# EAGLE board picoAvaR13 (EAGLE 6.1)
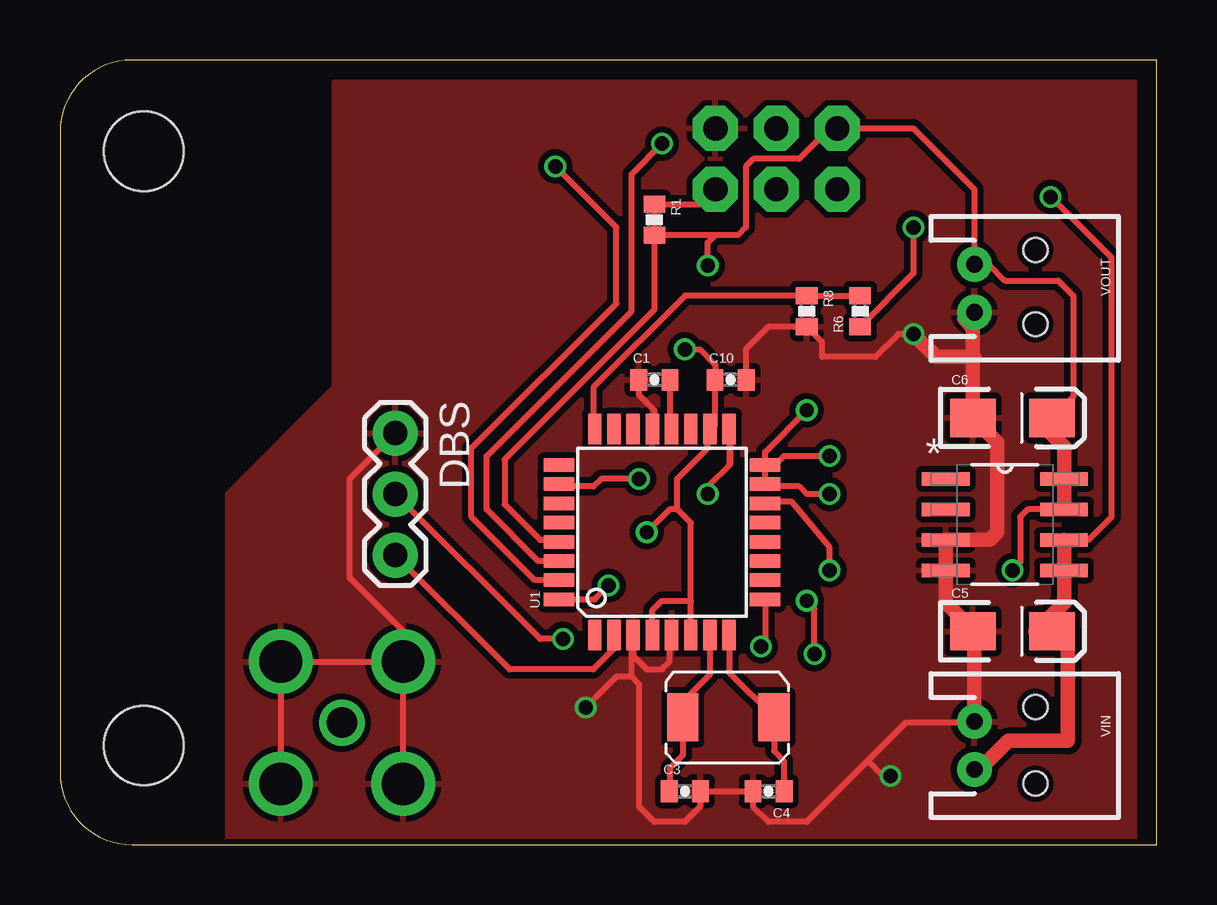
[diagram p0: board, top side]
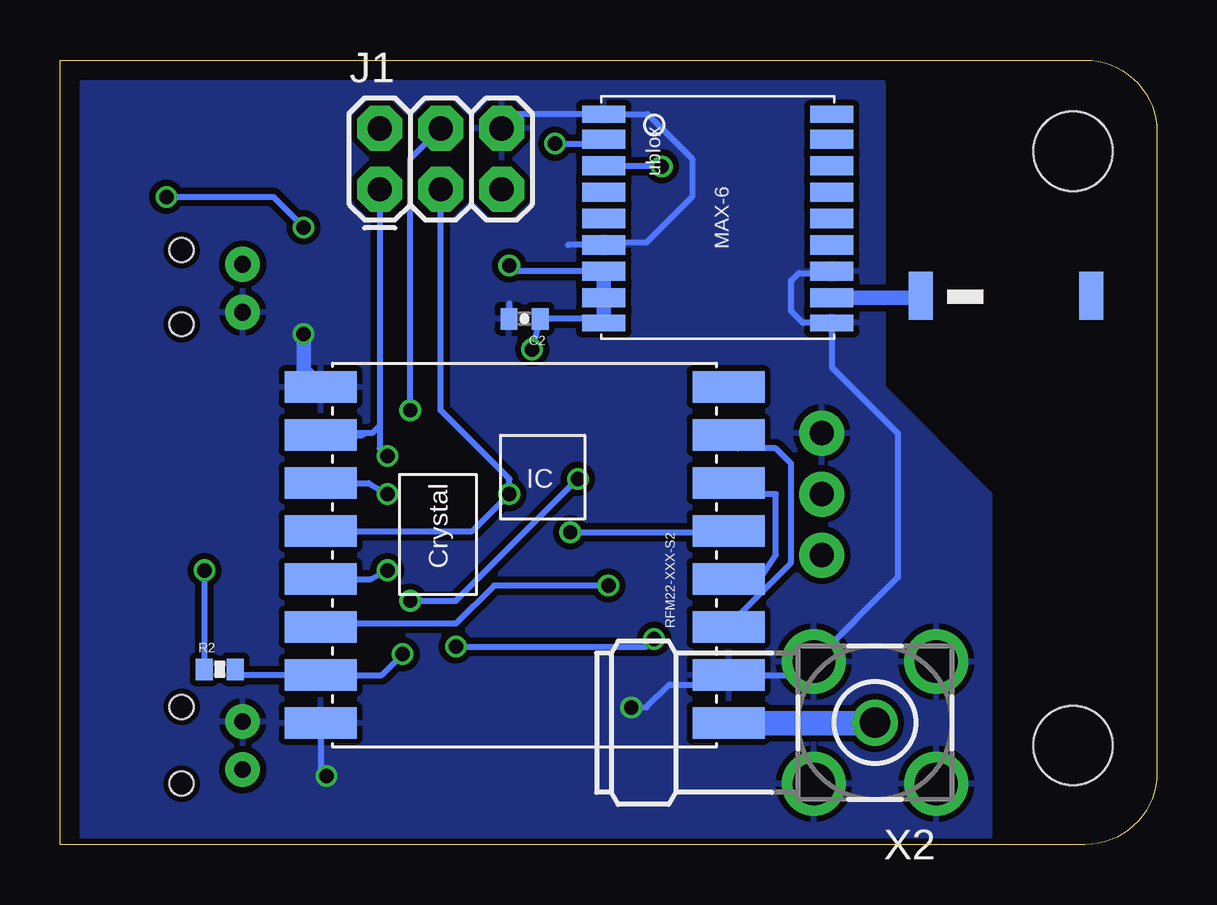
[diagram p1: board, bottom side, seen from below]

Size 45.71 x 32.69 mm. Coordinates in mm from the lower left corner, seen from the top.
Outline: 0,29.69 0,3 arc90 3,0 45.71,0 45.71,32.69 3,32.69 arc90 0,29.69
Copper layers (1*16): Top 0.035mm / dielectric 1.5mm / Bottom 0.035mm
Design rules: minimum track width 6mil, minimum drill 12mil, track to track 6mil, track to pad 6mil, pad to pad 6mil, via to via 6mil, smd to smd 0mil, copper to edge 10mil, drill to drill 10mil, minimum pad ring 10mil, minimum via ring 6mil, stop-mask expansion 2mil, vias tented up to drill 100mil, thermal gap 10mil
Net classes: 0 default: width 0.203 mm; 1 vcc: width 0.254 mm
Holes 1 mm at 40.64,5.74 40.64,2.54 40.64,21.68 40.64,24.77

## Footprints (pad centres in the part's own frame; a part is rotated, then mirrored left to right if it is on the bottom)
0402-CAP = smd 0.7 x 0.9: 1 -0.65,0; 2 0.65,0
EIA3216-KIT = smd 1.9 x 1.6: A 1.65,0; C -1.65,0
1X03 = drill 1.016 pad 1.88: 1 0,0; 2 2.54,0; 3 5.08,0
2X3 = drill 1.016 pad 1.88 octagon: 1 0,0; 2 0,2.54; 3 2.54,0; 4 2.54,2.54; 5 5.08,0; 6 5.08,2.54
STAND-OFF = hole 3.302: 0,0
0402-RES = smd 0.7 x 0.9: 1 -0.65,0; 2 0.65,0
RFM22-XXX-S2 = smd 3 x 1.3: 1 -8.5,7; 2 -8.5,5; 3 -8.5,3; 4 -8.5,1; 5 -8.5,-1; 6 -8.5,-3; 7 -8.5,-5; 8 -8.5,-7; 9 8.5,-7; 10 8.5,-5; 11 8.5,-3; 12 8.5,-1; 13 8.5,1; 14 8.5,3; 15 8.5,5; 16 8.5,7
TQFP32-08 = smd 1.27 x 0.559: 1 -4.293,2.8; 2 -4.293,2; 3 -4.293,1.2; 4 -4.293,0.4; 5 -4.293,-0.4; 6 -4.293,-1.2; 7 -4.293,-2; 8 -4.293,-2.8; 17 4.293,-2.8; 18 4.293,-2; 19 4.293,-1.2; 20 4.293,-0.4; 21 4.293,0.4; 22 4.293,1.2; 23 4.293,2; 24 4.293,2.8 | smd 0.559 x 1.27: 9 -2.8,-4.293; 10 -2,-4.293; 11 -1.2,-4.293; 12 -0.4,-4.293; 13 0.4,-4.293; 14 1.2,-4.293; 15 2,-4.293; 16 2.8,-4.293; 25 2.8,4.293; 26 2,4.293; 27 1.2,4.293; 28 0.4,4.293; 29 -0.4,4.293; 30 -1.2,4.293; 31 -2,4.293; 32 -2.8,4.293
SOIC127P600X175-8N = smd 1.981 x 0.559: 1 -2.464,1.905; 2 -2.464,0.635; 3 -2.464,-0.635; 4 -2.464,-1.905; 5 2.464,-1.905; 6 2.464,-0.635; 7 2.464,0.635; 8 2.464,1.905
UBLOX_MAX-6 = smd 1.8 x 0.7: 1_GND 4.95,-4.4; 9_V_RESET 4.95,4.3; 10_GND -4.55,4.3; 18_RESERVED -4.55,-4.4 | smd 1.8 x 0.8: 2_TXD1 4.95,-3.35; 3_RXD1 4.95,-2.25; 4_TIMEPULSE 4.95,-1.15; 5_EXTINT0 4.95,-0.05; 6_V_BCKP 4.95,1.05; 7_VCC_IO 4.95,2.15; 8_VCC 4.95,3.25; 11_RF_IN -4.55,3.25; 12_GND -4.55,2.15; 13_ANTON -4.55,1.05; 14_VCC_RF -4.55,-0.05; 15_RESERVED -4.55,-1.15; 16_SDA2 -4.55,-2.25; 17_SCL2 -4.55,-3.35
ABRACON_ABM3_CRYSTAL = smd 1.3 x 2: P$1 -3.4,0.1; P$2 0.4,0.1
JTI_ANTENNA-1575AT43A40 = smd 1 x 2: FEED -3.81,-1.27; NC 3.29,-1.27
JST-2-PTH = drill 0.7 pad 1.448: 1 -1,0; 2 1,0
BU-SMA-H = drill 1.27: 1 0,0 | drill 1.778: 2 -2.55,2.55; 3 2.55,2.55; 4 2.55,-2.55; 5 -2.55,-2.55

## Placement (x,y rotation side)
C1  0.1uF  [0402-CAP]  24.77,19.37 0 top
C2  0.1uF  [0402-CAP]  26.35,21.91 180 bottom
C3  18pF  [0402-CAP]  26.04,2.22 0 top
C4  18pF  [0402-CAP]  29.53,2.22 180 top
C5  [EIA3216-KIT]  39.69,8.89 0 top
C6  4.7uF  [EIA3216-KIT]  39.69,17.78 0 top
C10  0.1uF  [0402-CAP]  27.94,19.37 0 top
DBS  [1X03]  13.97,17.14 270 top
J1  AVR_SPI_PRG_6PTH  [2X3]  32.38,27.3 0 bottom
JP1  STAND-OFF  [STAND-OFF]  3.49,4.13 0 top
JP2  STAND-OFF  [STAND-OFF]  3.49,28.89 0 top
R1  10k  [0402-RES]  24.77,26.04 270 top
R2  10k  [0402-RES]  39.05,7.3 0 bottom
R6  100k  [0402-RES]  33.34,22.23 90 top
R8  10k  [0402-RES]  31.11,22.23 270 top
RFM22-XXX-S2  RFM22  [RFM22-XXX-S2]  26.35,12.06 180 bottom
U1  ATMEGA328  [TQFP32-08]  25.08,13.02 90 top
U2  TPS76633D  [SOIC127P600X175-8N]  39.37,13.34 0 top
U$1  UBLOX_MAX-6  [UBLOX_MAX-6]  18.1,26.04 180 bottom
U$2  ABRACON_ABM3_CRYSTAL  [ABRACON_ABM3_CRYSTAL]  26.35,5.4 180 top
U$3  JTI_ANTENNA-1575AT43A40  [JTI_ANTENNA-1575AT43A40]  6.03,24.13 0 bottom
VIN  [JST-2-PTH]  38.1,4.13 270 top
VOUT  [JST-2-PTH]  38.1,23.18 270 top
X2  BU-SMA-H  [BU-SMA-H]  11.75,5.08 180 bottom

## Library data of the parts
C1-C6 C10 DBS J1 JP1 JP2 R1 R2 R6 R8 RFM22-XXX-S2 U1 VIN VOUT = SparkFun
U2 = ava; DESCRIPTION: ULTRALOW QUIESCENT CURRENT 250-mA LOW DROPOUT VOLTAGE REGULATORS; MPN: TPS76633D; OC_FARNELL: 8461422; OC_NEWARK: 77C1060; PACKAGE: SOIC-8; SUPPLIER: Texas Instruments
U$1-U$3 = ava
X2 = con-coax; OC_FARNELL: unknown; OC_NEWARK: unknown

## Nets
AREF: C1.2 U1.20
GND [vcc]: C1.1 C2.2 C3.2 C4.2 C5.C C6.C C10.2 DBS.1 J1.6 R8.2 RFM22-XXX-S2.2 RFM22-XXX-S2.9 RFM22-XXX-S2.16 U1.3 U1.5 U1.21 U2.3 U2.4 U$1.1_GND U$1.6_V_BCKP U$1.10_GND U$1.12_GND VIN.1 VOUT.2 X2.2 X2.3 X2.4 X2.5
MISO: J1.1 RFM22-XXX-S2.10 U1.16
MOSI: J1.4 RFM22-XXX-S2.11 U1.15
N$3: RFM22-XXX-S2.1 X2.1
N$4: U$1.11_RF_IN U$3.FEED
N$5: RFM22-XXX-S2.3 RFM22-XXX-S2.7
N$6: RFM22-XXX-S2.4 RFM22-XXX-S2.6
N$9: C3.1 U1.7 U$2.P$2
N$10: C4.1 U1.8 U$2.P$1
NSS_RX: DBS.2 U1.9
NSS_TX: DBS.3 U1.2
RESET: J1.5 R1.1 U1.29
RFM22_NIRQ: RFM22-XXX-S2.14 U1.32
RFM22_NSEL: RFM22-XXX-S2.13 U1.14
RFM22_SDN: R2.2 RFM22-XXX-S2.15 U1.26
SCK: J1.3 RFM22-XXX-S2.12 U1.17
UBLOX_RXD: U1.31 U$1.3_RXD1
UBLOX_TXD: U1.30 U$1.2_TXD1
VBATT [vcc]: C5.A R6.1 U2.5 U2.6 VIN.2
VBATTADC: R6.2 R8.1 U1.24
VCC: C2.1 C6.A C10.1 J1.2 R1.2 R2.1 RFM22-XXX-S2.5 U1.4 U1.6 U1.18 U2.7 U2.8 U$1.7_VCC_IO U$1.8_VCC U$1.9_V_RESET VOUT.1

## Tracks (layer width: path | path; a pad name or v marks a point on that pad's centre or on a via)
AREF
  Top 0.254: C1.2 25.41,17.24 | 25.4,17.14 25.41,17.16 25.41,17.24 | 25.41,17.24 U1.20
GND  (via drill 0.6)
  Top 0.254: C1.1 24.11,18.75 24.77,18.1 24.77,17.39 U1.21 | C10.2 28.57,19.38 28.57,20.64 29.51,21.57 R8.2 31.75,20.94 31.75,20.32 33.97,20.32 34.92,21.27 v35.56,21.27 | 23.81,6.99 24.13,6.67 24.13,1.59 24.77,0.95 26.04,0.95 26.68,1.6 C3.2 C4.2 28.89,2.21 28.89,1.59 29.53,0.95 31.11,0.95 33.66,3.49 | 23.81,6.99 23.81,8.65 U1.3 23.88,7.87 24.45,7.3 25.08,7.3 25.4,7.62 25.4,8.57 | C6.C 38.04,20.26 38.1,20.32 | 38.1,5.08 35.24,5.08 33.66,3.49 | v34.61,2.86 34.29,2.86 33.66,3.49 | 23.81,6.99 23.18,6.99 v21.91,5.71 | X2.3 X2.4 | X2.4 X2.5 X2.2 | X2.4 14.3,8.88 12.06,11.11 12.06,15.24 DBS.1
  Top 0.61: 38.28,22.23 37.96,21.91 37.67,21.91 38.04,21.54 C6.C 39.05,16.77 39.05,13.02 38.73,12.7 U2.3 U2.4 36.91,10.08 38.04,8.95 | 38.04,8.95 38.1,8.89 38.1,5.08 | C5.C 38.04,8.95 | 38.1,20.32 36.51,20.32 v35.56,21.27
  Bottom 0.254: RFM22-XXX-S2.16 34.85,3.1 v34.61,2.86 | v21.91,5.71 21.27,5.71 20.32,6.67 18.25,6.67 RFM22-XXX-S2.2 14.86,7.07 X2.4 10.79,11.13 10.79,17.14 13.55,19.9 U$1.10_GND 14.75,21.73 15.24,22.23 15.24,23.5 14.92,23.81 13.62,23.81 U$1.12_GND | J1.6 26.71,30.43 U$1.1_GND 21.23,30.43 19.37,28.57 19.37,26.99 21.27,25.08 22.95,25.08 U$1.6_V_BCKP 24.55,24.98 | 26.99,22.54 26.99,21.92 C2.2
  Bottom 0.61: 35.2,19.41 RFM22-XXX-S2.9 35.56,19.77 v35.56,21.27
  pour Bottom (isolate 0.254): 44.77,0 44.77,31.75 11.43,31.75 11.43,19.37 11.43,19.05 6.99,14.61 6.99,0
  pour Top (isolate 0.254): 44.77,0 44.77,31.75 11.43,31.75 11.43,19.37 11.43,19.05 6.99,14.61 6.99,0
MISO  (via drill 0.6)
  Top 0.254: v32.07,16.19 30.16,16.19 29.79,15.82 U1.16
  Bottom 0.254: J1.1 32.38,17.46 | 32.38,17.46 32.7,17.14 33.02,17.14 | 33.02,17.14 34.92,17.14 | RFM22-XXX-S2.10 33.1,17.07 33.02,17.14 | 32.38,17.46 32.38,16.51 v32.07,16.19
MOSI  (via drill 0.6)
  Top 0.254: v32.07,14.61 31.11,14.61 30.8,14.92 29.47,14.92 U1.15 29.38,16.36 v31.11,18.1
  Bottom 0.254: RFM22-XXX-S2.11 32.84,15.06 v32.07,14.61 | v31.11,18.1 31.11,28.57 J1.4
N$3
  Bottom 0.813: 11.76,5.07 X2.1
  Bottom 1.016: RFM22-XXX-S2.1 11.76,5.07
N$4
  Bottom 0.254: 9.92,22.79 U$3.FEED
  Bottom 0.61: U$1.11_RF_IN 9.92,22.79
N$5
  Bottom 0.254: RFM22-XXX-S2.3 17.85,9.13 15.24,11.75 15.24,15.88 15.88,16.51 17.46,16.51 17.78,16.83 17.78,17.14 | 17.78,17.14 | 17.78,17.14 RFM22-XXX-S2.7
N$6
  Bottom 0.254: RFM22-XXX-S2.4 16.56,11.06 15.88,12.06 15.88,14.61 17.39,14.61 RFM22-XXX-S2.6
N$9
  Top 0.254: U1.7 27.08,7.08 25.72,5.71 25.72,5.53 U$2.P$2 25.95,3.73 25.4,3.17 C3.1
N$10
  Top 0.254: U1.8 27.88,7.17 U$2.P$1 29.75,3.9 30.16,3.49 30.16,2.22 C4.1
NSS_RX  (via drill 0.6)
  Top 0.254: U1.9 29.38,8.42 v29.21,8.26 | v20.95,8.57 20,8.57 DBS.2
  Bottom 0.254: v29.21,8.26 21.27,8.26 v20.95,8.57
NSS_TX
  Top 0.254: U1.2 23.08,8.16 22.23,7.3 18.73,7.3 DBS.3
RESET
  Top 0.254: J1.5 26.68,26.68 R1.1 24.77,22.3 18.52,16.05 18.52,14.18 20,12.7 20.64,12.7 | 20.64,12.7 20.95,12.7 | U1.29 20.72,12.62 20.64,12.7
RFM22_NIRQ  (via drill 0.6)
  Top 0.254: U1.32 22.28,10.22 v22.86,10.79
  Bottom 0.254: v22.86,10.79 27.62,10.79 29.21,9.21 34.71,9.21 RFM22-XXX-S2.14
RFM22_NSEL  (via drill 0.6)
  Top 0.254: v32.07,11.43 32.07,12.38 30.48,14.29 29.45,14.29 U1.14
  Bottom 0.254: RFM22-XXX-S2.13 32.75,11.06 v32.07,11.43
RFM22_SDN  (via drill 0.6)
  Top 0.254: v31.43,7.94 31.43,9.84 v31.11,10.16 | v24.13,15.24 22.54,15.24 22.23,14.92 20.95,14.92 20.89,14.92 | 20.64,14.92 20.89,14.92 | 20.89,14.92 U1.26
  Bottom 0.254: R2.2 38.16,7.07 RFM22-XXX-S2.15 32.3,7.07 v31.43,7.94 | v31.11,10.16 29.21,10.16 v24.13,15.24
SCK  (via drill 0.6)
  Top 0.254: 27.88,15.82 27.94,15.88 27.94,17.25 U1.17 27.88,15.82 | 27.88,15.82 26.99,14.92 v26.99,14.61
  Bottom 0.254: RFM22-XXX-S2.12 28.53,13.06 v26.99,14.61 26.99,15.24 29.84,18.1 J1.3
UBLOX_RXD  (via drill 0.6)
  Top 0.254: U1.31 19.78,11.02 17.14,13.65 17.14,16.51 23.18,22.54 23.18,25.72 v20.64,28.26
  Bottom 0.254: v20.64,28.26 23.02,28.26 U$1.3_RXD1
UBLOX_TXD  (via drill 0.6)
  Top 0.254: U1.30 19.93,11.82 17.78,13.97 17.78,16.19 23.81,22.23 23.81,27.94 v25.08,29.21
  Bottom 0.254: v25.08,29.21 23.5,29.21 | 23.18,29.53 22.86,29.53 23.18,29.21 23.5,29.21 | 23.18,29.53 23.5,29.21 | 23.18,29.53 23.18,29.52 U$1.2_TXD1
VBATT  (via drill 0.6)
  Top 0.254: U2.6 42.86,12.7 43.81,13.65 43.81,24.45 v41.27,26.99 | v35.56,25.72 35.56,23.8 R6.1 | VIN.2 38.33,3.13 38.4,3.2
  Top 0.61: C5.A 40.64,8.89 41.83,10.08 U2.5 U2.6 | C5.A 41.91,8.89 | C5.A 41.99,8.89 41.99,4.32 39.52,4.32 38.4,3.2 38.28,3.09
  Bottom 0.254: v41.27,26.99 36.83,26.99 v35.56,25.72
VBATTADC
  Top 0.254: U1.24 22.23,17.37 22.23,19.05 26.05,22.88 R8.1 33.32,22.88 33.34,22.86 R6.2
VCC  (via drill 0.6)
  Top 0.254: 27.3,25.4 28.26,25.4 28.57,25.72 28.57,28.26 28.89,28.57 30.8,28.57 32.07,29.84 J1.2 35.56,29.84 38.1,27.3 VOUT.1 | 27.3,25.4 R1.2 | 26.99,17.14 27.29,17.45 C10.1 27.3,19.38 27.3,20 26.67,20.64 v26.04,20.64 | U1.6 26.28,10.16 | 26.28,10.16 26.28,13.4 25.72,13.97 | 25.72,13.97 25.72,15.24 26.99,16.51 26.99,17.14 | 25.72,13.97 25.4,13.97 v24.45,13.02 | VOUT.1 38.1,23.81 | VOUT.1 38.69,24.18 39.37,23.5 41.59,23.5 42.23,22.86 42.23,18.67 C6.A | U1.4 24.68,9.76 25.08,10.16 26.28,10.16 | U2.7 40.32,13.97 40.01,13.65 40.01,11.75 v39.69,11.43 | v26.99,24.13 26.99,25.08 27.3,25.4 | 26.99,17.14 26.99,17.21 U1.18
  Top 0.61: C6.A 41.27,17.72 41.27,17.14 41.83,16.59 U2.8 U2.7
  Bottom 0.254: v24.45,13.02 17.8,13.02 | 23.18,21.59 23.5,21.91 C2.1 25.72,21.91 v26.04,20.64 | 23.18,21.59 22.86,21.59 | v39.69,11.43 39.69,7.32 R2.1 | 17.78,13.02 17.8,13.02 | 17.8,13.02 RFM22-XXX-S2.5 | 23.18,21.59 23.18,21.61 U$1.9_V_RESET | U$1.7_VCC_IO 26.74,23.89 v26.99,24.13
  Bottom 0.61: U$1.9_V_RESET U$1.8_VCC U$1.7_VCC_IO

## Text on the board
tStop: µAva